# Altium PCB PCB2.PcbDoc
Units mil, origin at the board's own origin, x right, y up, seen from the top; angles counter-clockwise.
Board outline 1975 x 3155 mil, 2 copper layers (Top Layer, Bottom Layer); 11 components, 6 nets, 23 pads, 0 vias.
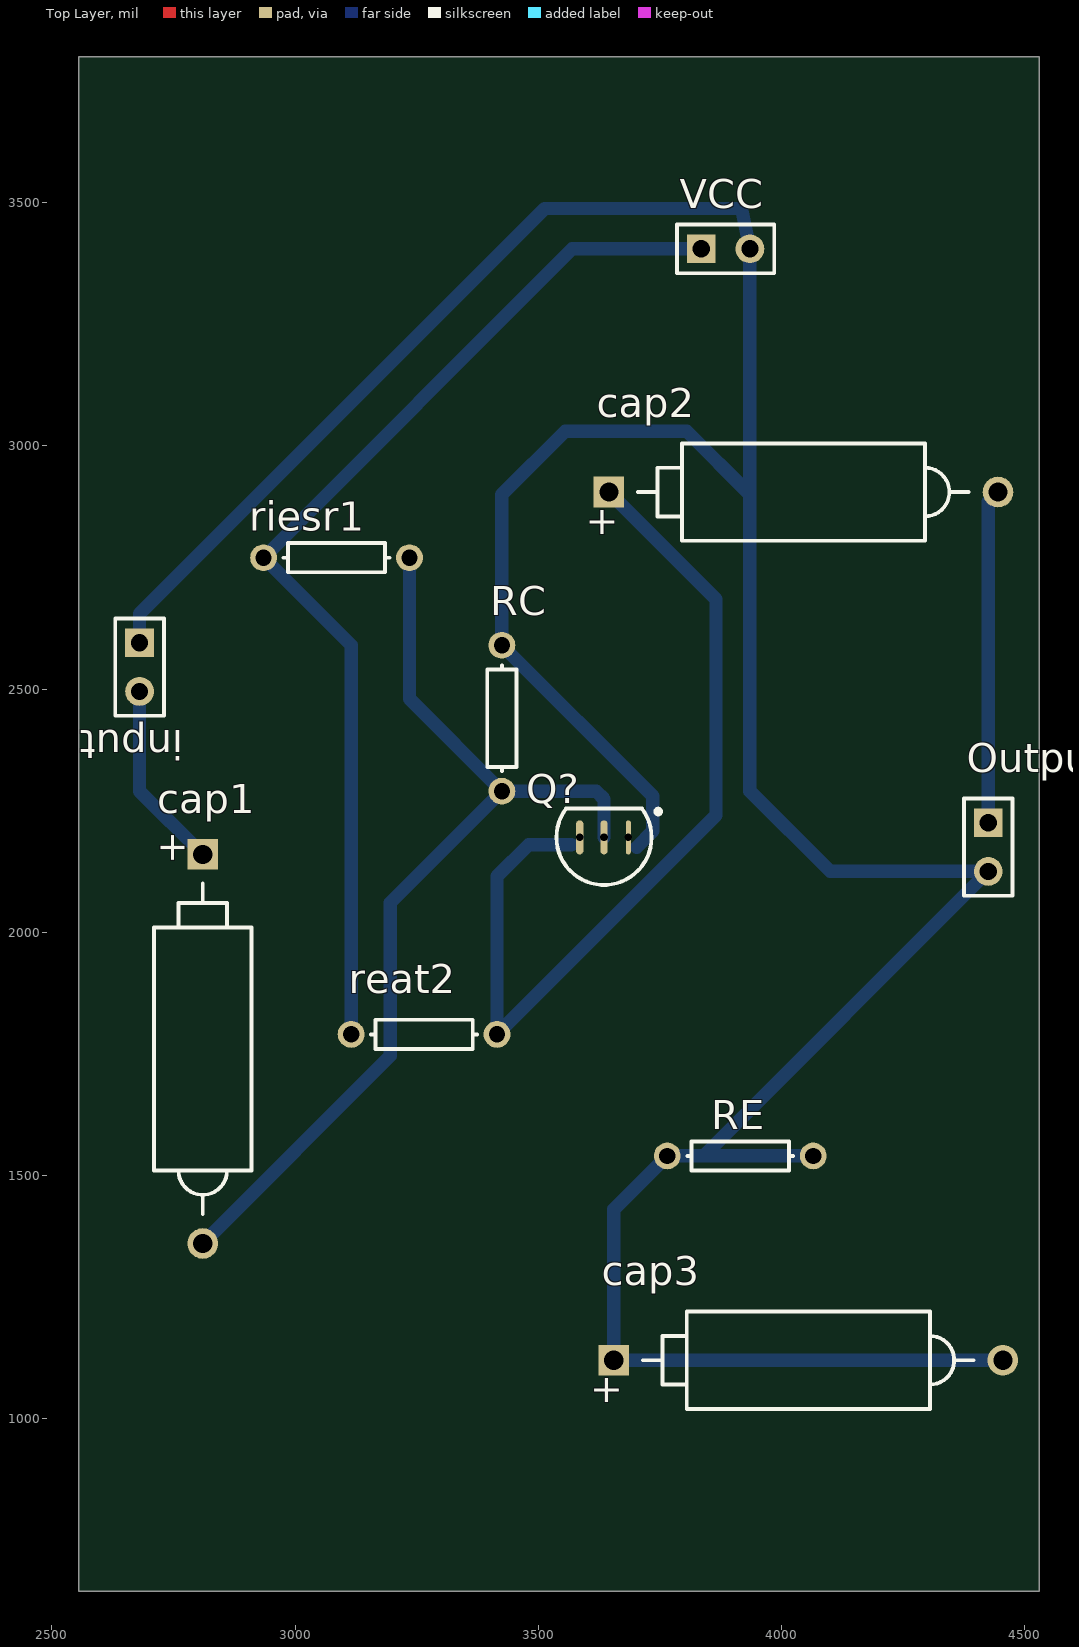
[diagram p0: Top Layer view]
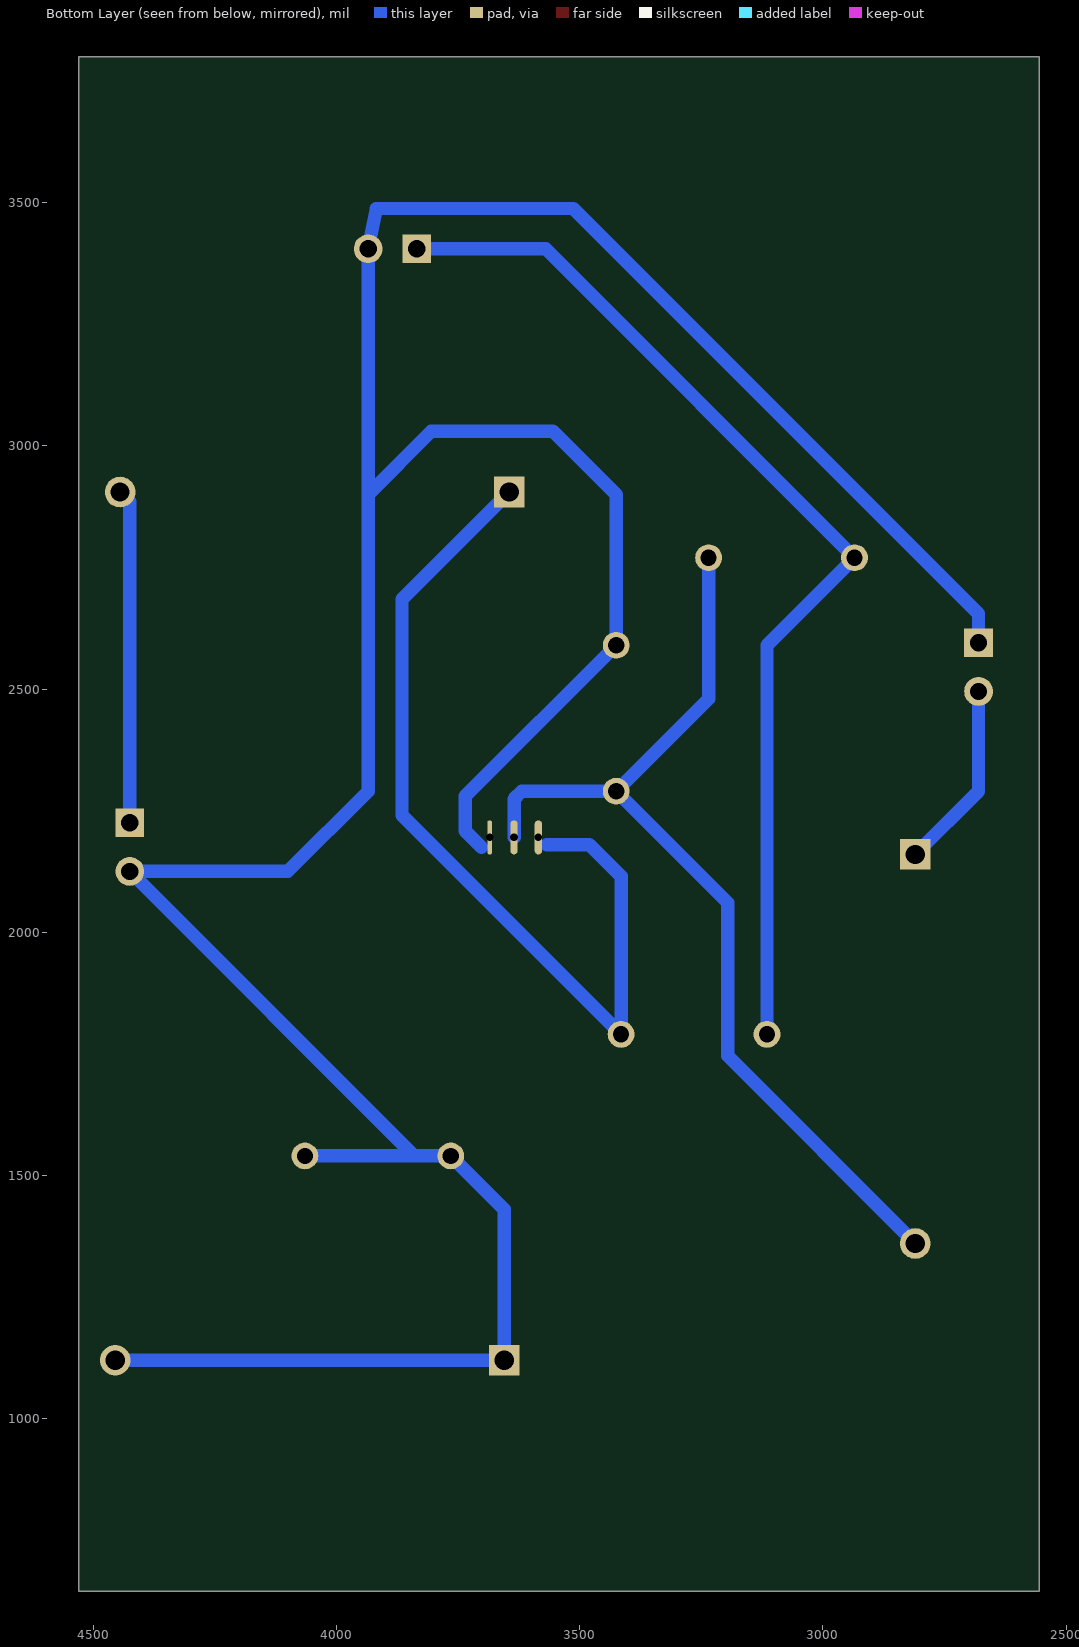
[diagram p1: Bottom Layer view, seen from below]

## Layer stack, top to bottom
Top Solder: solder mask 0.4, Solder Resist, Dk 3.5
Top Layer: signal copper 1.4
Dielectric 1: dielectric 12.6, FR-4, Dk 4.8
Bottom Layer: signal copper 1.4
Bottom Solder: solder mask 0.4, Solder Resist, Dk 3.5

## Board outline
2555,645 4530,645 4530,3800 2555,3800

## Design rules (kind name [scope] priority, off if disabled: settings)
Clearance [All] p1: gap=39.37 ignorepadtopadclearanceinfootprint=FALSE
PolygonConnect [All] p1: connectstyle=Direct reliefconductorwidth=10 reliefentries=4 polygonreliefangle="90 Angle" airgapwidth=10
RoutingLayers [All] p1: top layer_v5=FALSE bottom layer_v5=TRUE
RoutingVias [All] p1: holewidth=28 width=50 viastyle="Through Hole" minholewidth=28 minwidth=50 maxholewidth=28 maxwidth=50
SolderMaskExpansion [All] p1: expansion=4 istentingtop=FALSE
Width [All] p1: maxlimit=27.56 minlimit=7.87 preferedwidth=27.56
29 further rules are at their usual default settings.

## Components (designator, comment, footprint, x,y, rotation, side; value= is the part's Value field where it differs from the comment)
cap1 "Cap Pol2" POLAR0.8 2810,1760 r90 top value=100pF
cap2 "Cap Pol2" POLAR0.8 4045,2905 r180 top value=100pF
cap3 "Cap Pol2" POLAR0.8 4055,1120 r180 top value=100pF
input "Header 2" HDR1X2 2680,2595 r270 top
Output "Header 2" HDR1X2 4425,2225 r270 top
Q? "2N3904" TO-92A 3635,2195 r90 top
RC "Res1" AXIAL-0.3 3425,2440 r270 top value=1K
RE "Res1" AXIAL-0.3 3915,1540 r180 top value=1K
reat2 "Res1" AXIAL-0.3 3265,1790 r180 top value=1K
riesr1 "Res1" AXIAL-0.3 3085,2770 r180 top value=1K
VCC "12V" HDR1X2 3835,3405 r0 top

## Footprints (in the part's own frame and the unit in brackets; to place one, negate y for a bottom-side part, rotate by r counter-clockwise, add the part's x,y. Pads: shape width x height; smd on the part's side, far side on the other; paste and mask are expansions set on the pad)
AXIAL-0.3 [mm] "Axial Device, Thru-Hole; 2 Leads; 0.3 in Pin Spacing"
  round 1.4 hole 0.85: 1(-3.81,0) 2(3.81,0)
  silkscreen extent -2.77,-0.76 2.77,0.76
HDR1X2 [mm] "Connector; Header; 2 Position"
  rect 1.5x1.5 hole 0.9: 1(0,0)
  round 1.5 hole 0.9: 2(2.54,0)
  silkscreen extent -1.27,-1.27 3.81,1.27
POLAR0.8 [mm] "Polarized Capacitor; 2 Leads"
  rect 1.6x1.6 hole 1: 1(10.16,0)
  round 1.6 hole 1: 2(-10.16,0)
  silkscreen extent -8.64,-2.54 8.64,2.54
TO-92A [mil] "TO, Flat Index; 3 In-Line, Axial Leads; Body Dia. 4.5mm; Leads 0.51 x 0.48 mm (max)"
  oval 70.12x10.11 hole 15.87: 1(0,-50)
  oval 70.12x15 hole 15.87: 2(0,0)
  oval 70.12x15.12 hole 15.87: 3(0,50)
  silkscreen extent -98,-116 59,98, body extent -98,-98 59,98, height 270

## Part data
cap1 cap2 cap3: "Polarized Capacitor (Axial)", LatestRevisionDate=17-Jul-2002, LatestRevisionNote="Re-released for DXP Platform.", PackageDescription="Polarized Capacitor; 2 Leads", PackageReference=POLAR0.8, Published=8-Jun-2000, Publisher="Altium Limited"
input Output: "Header, 2-Pin", LatestRevisionDate=17-Jul-2002, LatestRevisionNote="Re-released for DXP Platform.", Publisher="Altium Limited"
Q?: "NPN General Purpose Amplifier", ComponentLink1Description="Manufacturer Link", ComponentLink1URL=http://www.fairchildsemi.com/, ComponentLink2Description=Datasheet, ComponentLink2URL=http://www.fairchildsemi.com/ds/2N%2F2N3904.pdf, DatasheetVersion=1997, LatestRevisionDate=15-Jan-2003, LatestRevisionNote="PCB Footprint 'BCY-W3/D4.7' replaced", PackageDescription="TO, Flat Index; 3 In-Line, Axial Leads; Body Dia. 4.5mm; Leads 0.51 x 0.48 mm (max)", PackageReference=TO-92A, PackageVersion=Sep-1998, Published=8-Jun-2000, Publisher="Altium Limited"
RC RE reat2 riesr1: "Resistor", LatestRevisionDate=17-Jul-2002, LatestRevisionNote="Re-released for DXP Platform.", PackageDescription="Axial Device, Thru-Hole; 2 Leads; 0.3 in Pin Spacing", PackageReference=AXIAL-0.3, Published=8-Jun-2000, Publisher="Altium Limited"
VCC: library part "Header 2", "Header, 2-Pin", LatestRevisionDate=17-Jul-2002, LatestRevisionNote="Re-released for DXP Platform.", Publisher="Altium Limited"

## Nets (pads, with @x,y where several pads share a name; then routed paths per layer and width w, separated by ;. In a path a pad name is that pad's centre, name@x,y a point inside that pad or via, vN(x,y) a via of type N, cw(c..) or ccw(c..) an arc to the next point about the centre after c; other vN are vias at no path point)
GND: cap3.1 cap3.2 input.1 Output.2 Q?.1 RC.1 RE.1 RE.2 VCC.2 | length 7278.8
  Bottom Layer w27.56: input.1 2680,2655 3513,3488 3918,3488 VCC.2 3935,2900 ; 3701.93,2175 3735,2208.07 3735,2280 RC.1 3425,2900 3555,3030 3805,3030 3935,2900 ; RE.1 3840,1540 ; cap3.2 cap3.1 3655,1430 RE.2 3840,1540 ; 3840,1540 Output.2 4100,2125 3935,2290 3935,2900
Netcap1_1: cap1.1 input.2 | length 388.8
  Bottom Layer w27.56: input.2 2680,2290 cap1.1
Netcap1_2: cap1.2 Q?.2 RC.2 riesr1.1 | length 2039
  Bottom Layer w27.56: cap1.2 3195.71,1745.71 3195.71,2060.71 RC.2 ; riesr1.1 3235,2480 RC.2 ; Q?.2 3635,2273.86 3618.86,2290 RC.2
Netcap2_1: cap2.1 Q?.3 reat2.1 | length 1897.8
  Bottom Layer w27.56: 3568.07,2180 3480,2180 3415,2115 reat2.1 3865.29,2240.29 3865.29,2684.71 cap2.1
Netcap2_2: cap2.2 Output.1 | length 688.3
  Bottom Layer w27.56: Output.1 4425,2885 cap2.2
Netreat2_2: reat2.2 riesr1.2 VCC.1 | length 2217.6
  Bottom Layer w27.56: reat2.2 3115,2590 riesr1.2 3570,3405 VCC.1

## Dimensions
2555,3800 to 2425,650 on Top Layer
2555,3895 to 4525,3805 on Top Layer

## Text inside footprints (layer, text, board x,y; h text height)
cap1: Top Overlay "+" at 2772.6,2140 h59.06 r90
cap2: Top Overlay "+" at 3665,2867.6 h59.06 r180
cap3: Top Overlay "+" at 3675,1082.6 h59.06 r180